# Altium PCB Receptor_AIS_R00.PcbDoc (part 1 of 2)
Units mm, origin at the board's own origin, x right, y up, seen from the top; angles counter-clockwise.
Board outline 80 x 80 mm, 4 copper layers (Top Layer, Layer 1, Layer 2, Bottom Layer), stack 1.587 mm thick; 130 components, 68 nets, 396 pads, 647 vias.
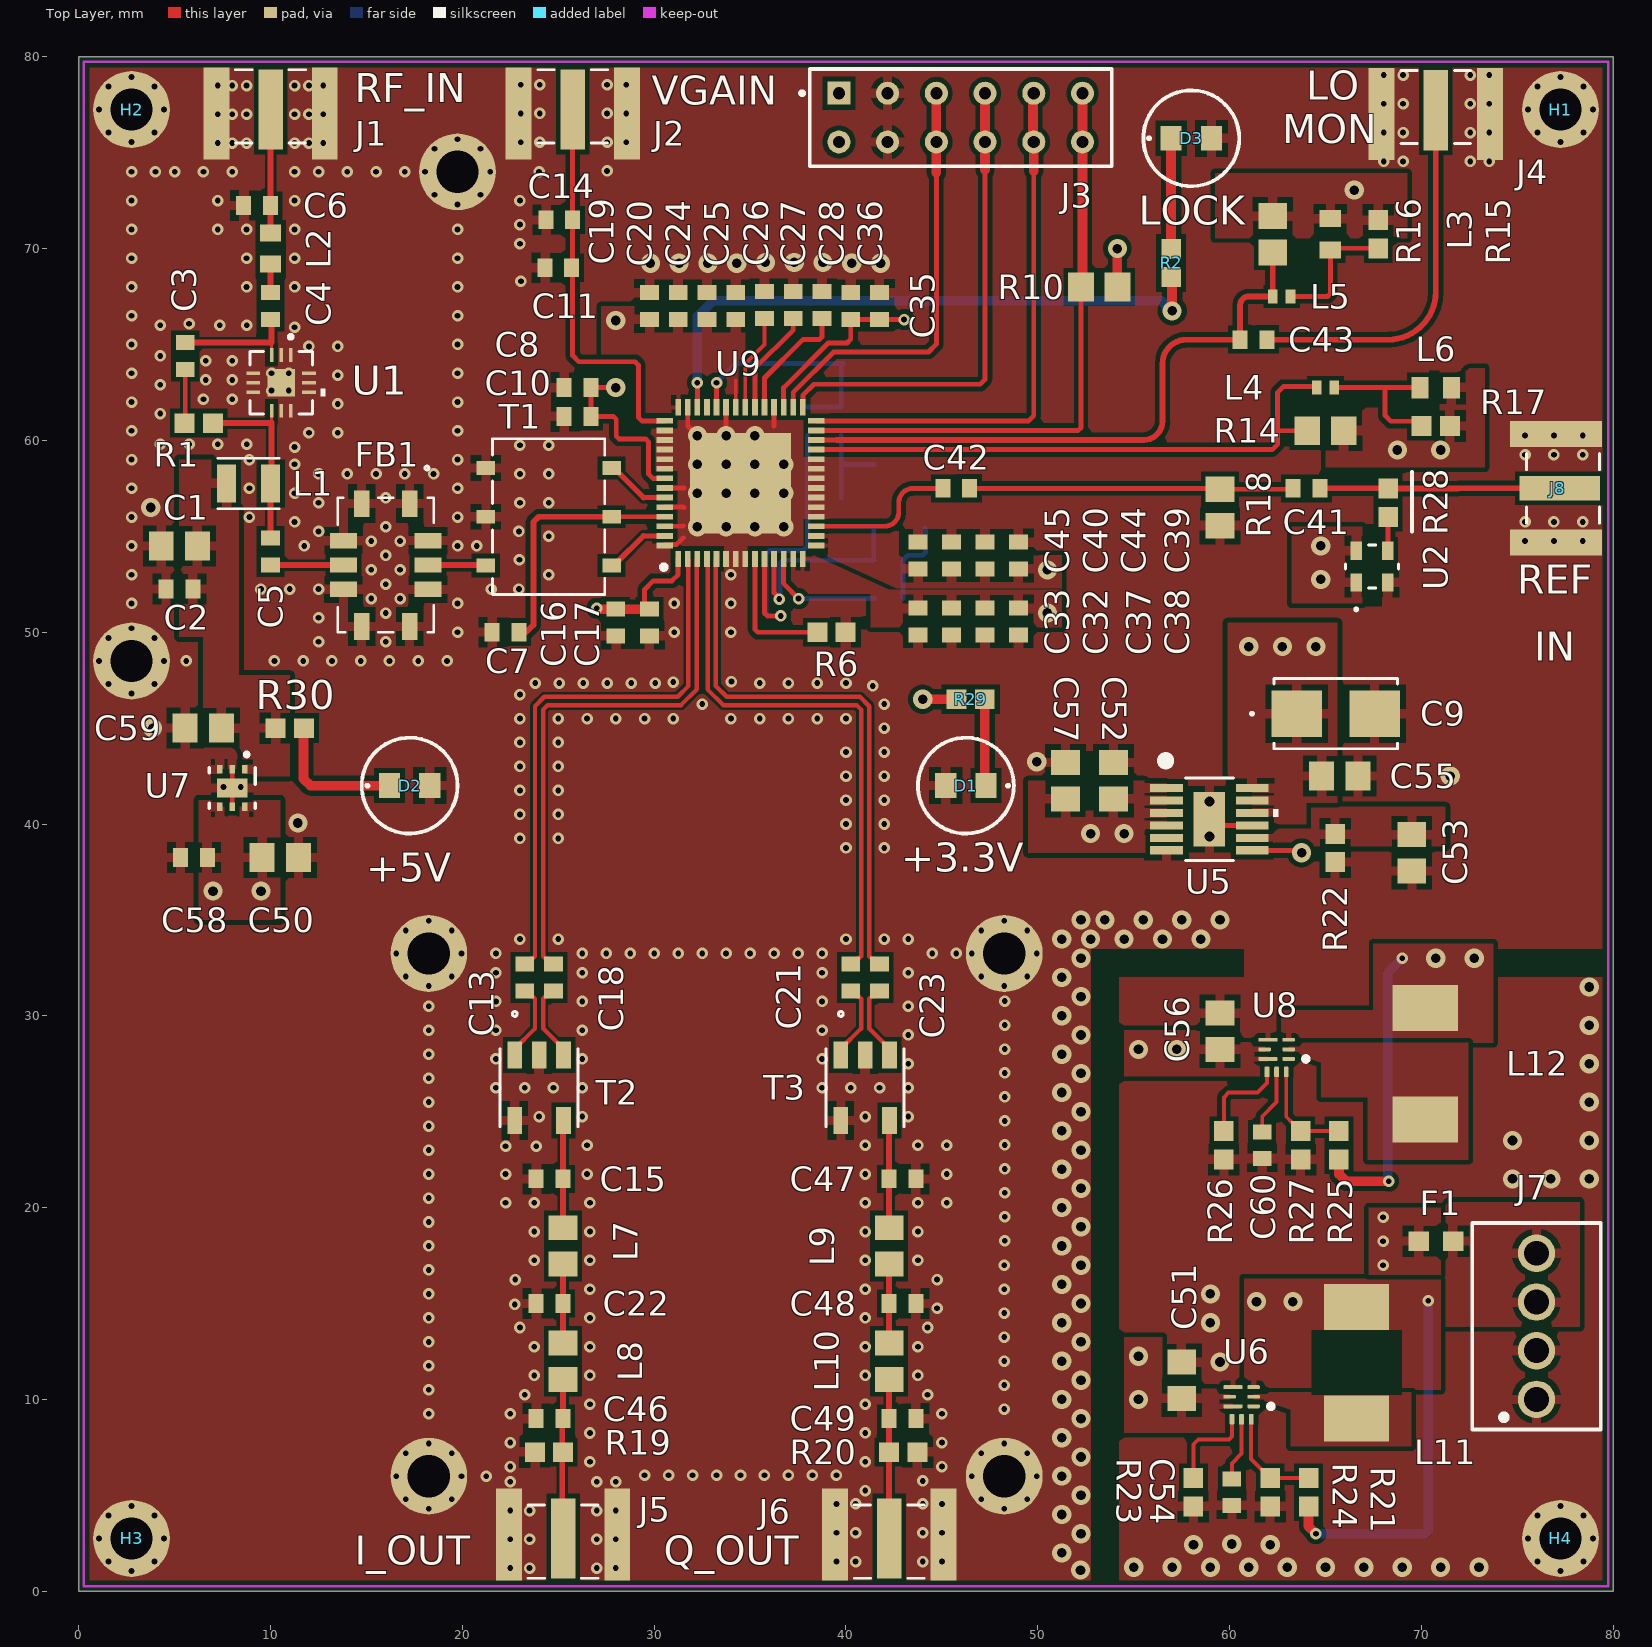
[diagram p0: Top Layer view]
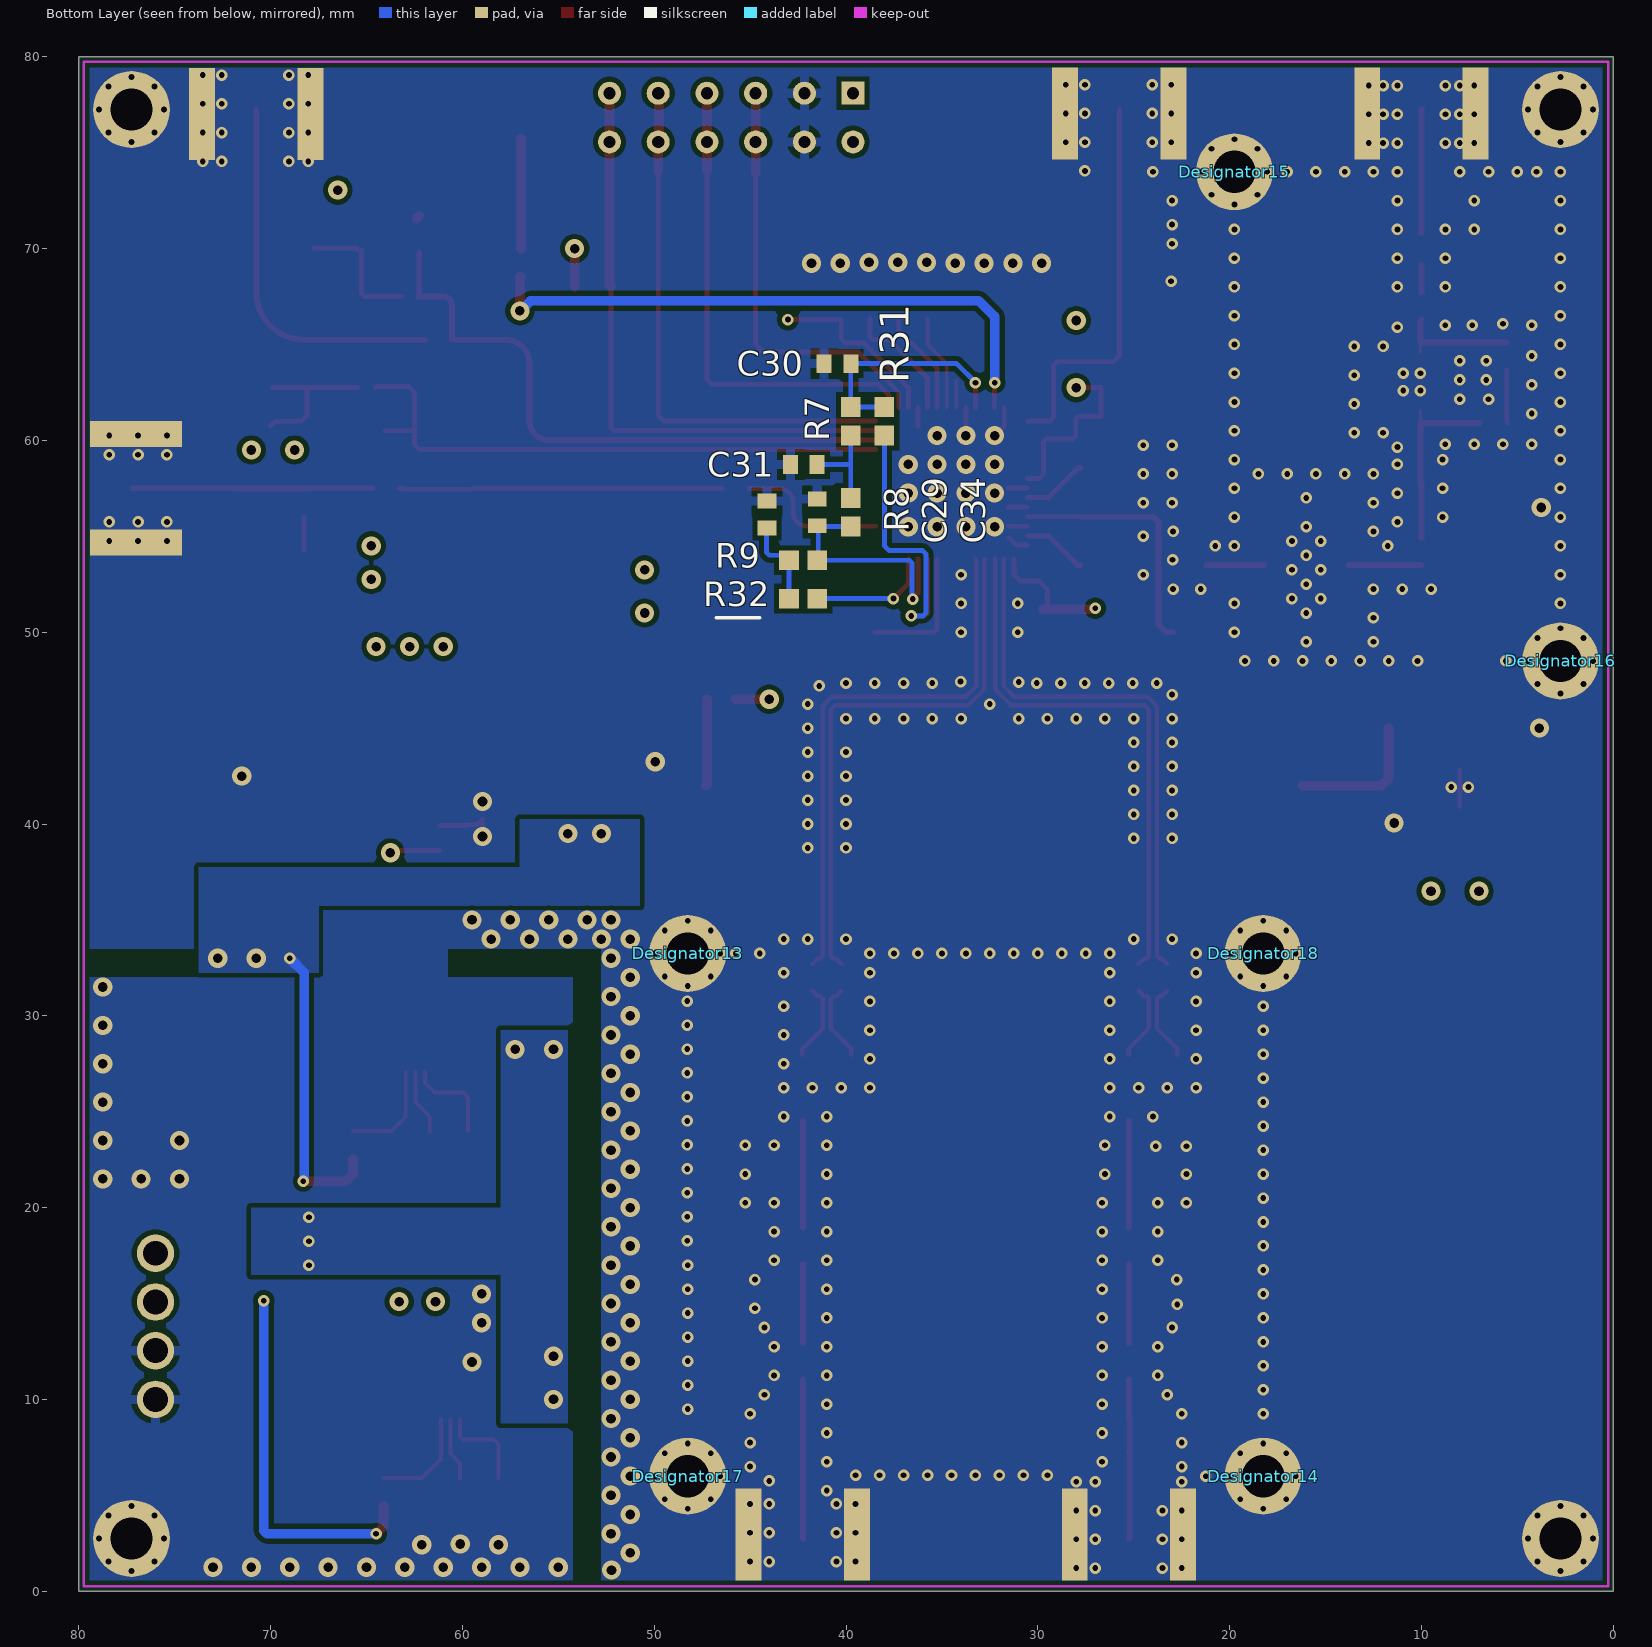
[diagram p1: Bottom Layer view, seen from below]
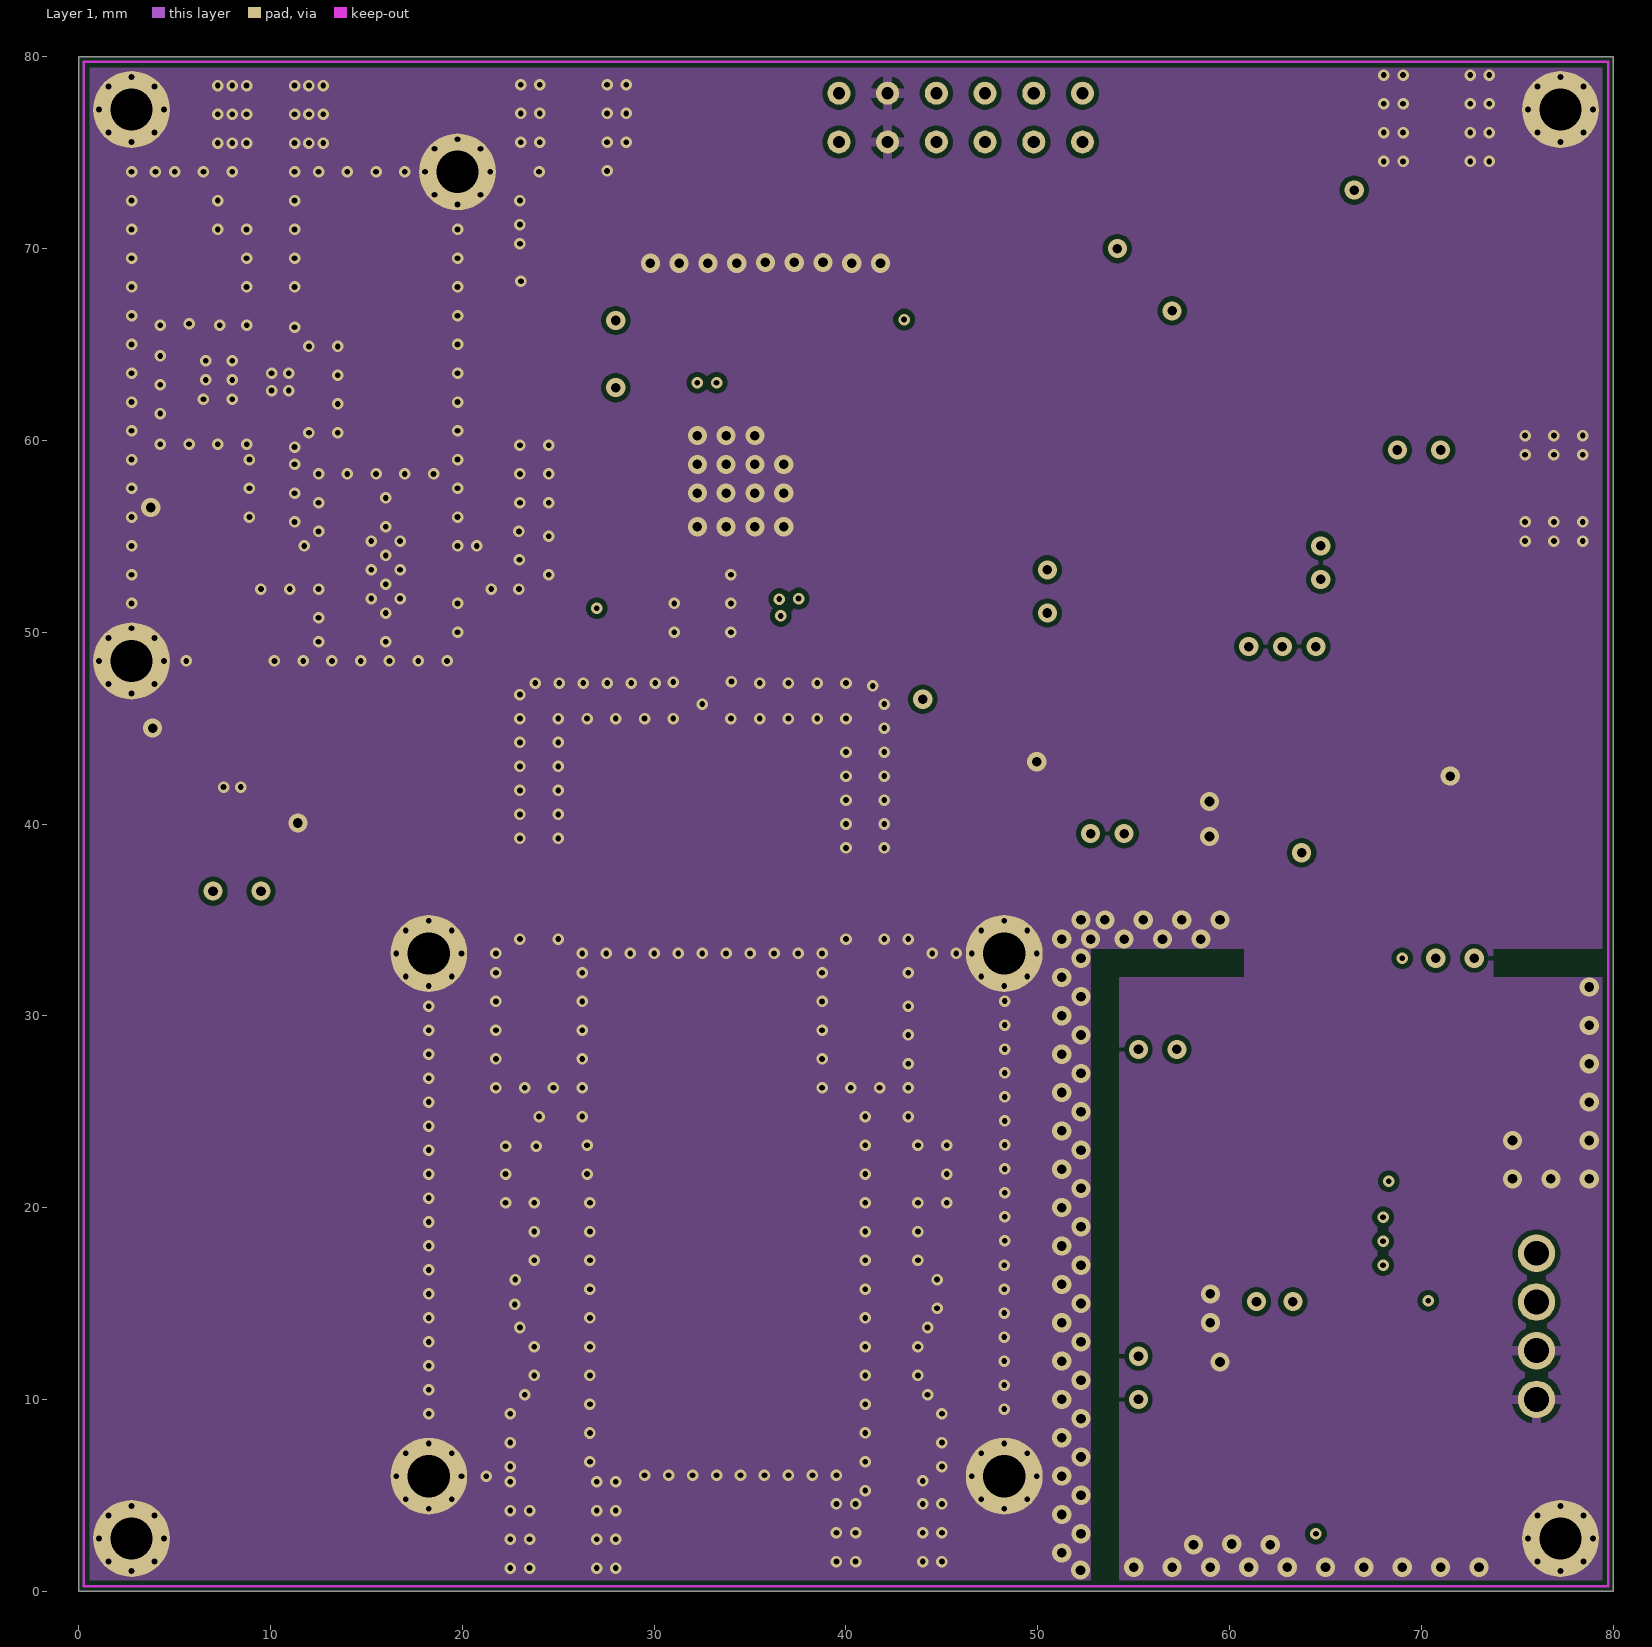
[diagram p2: Layer 1]
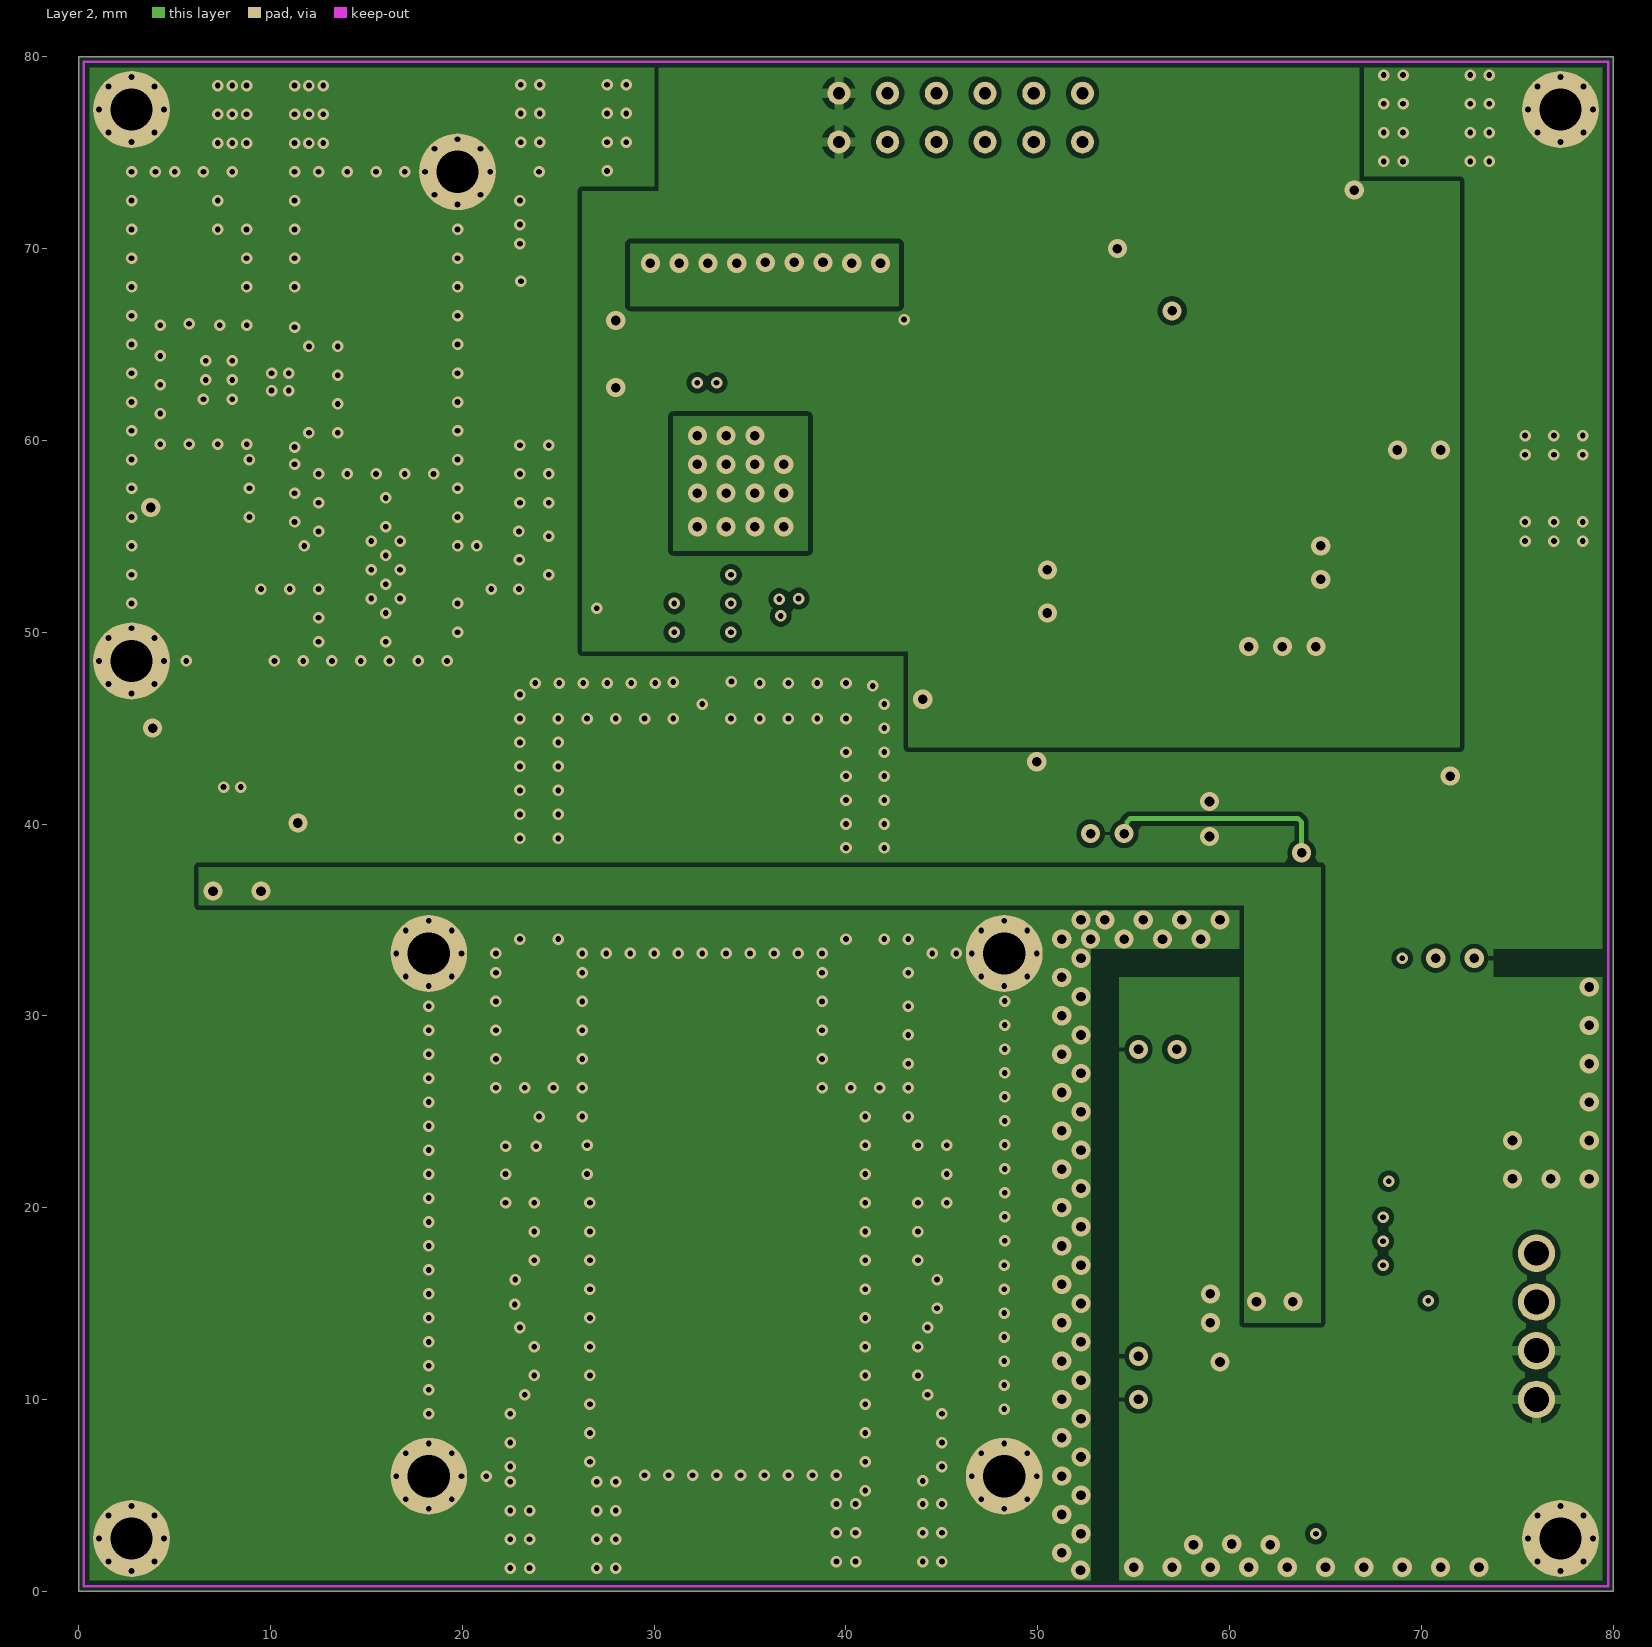
[diagram p3: Layer 2]
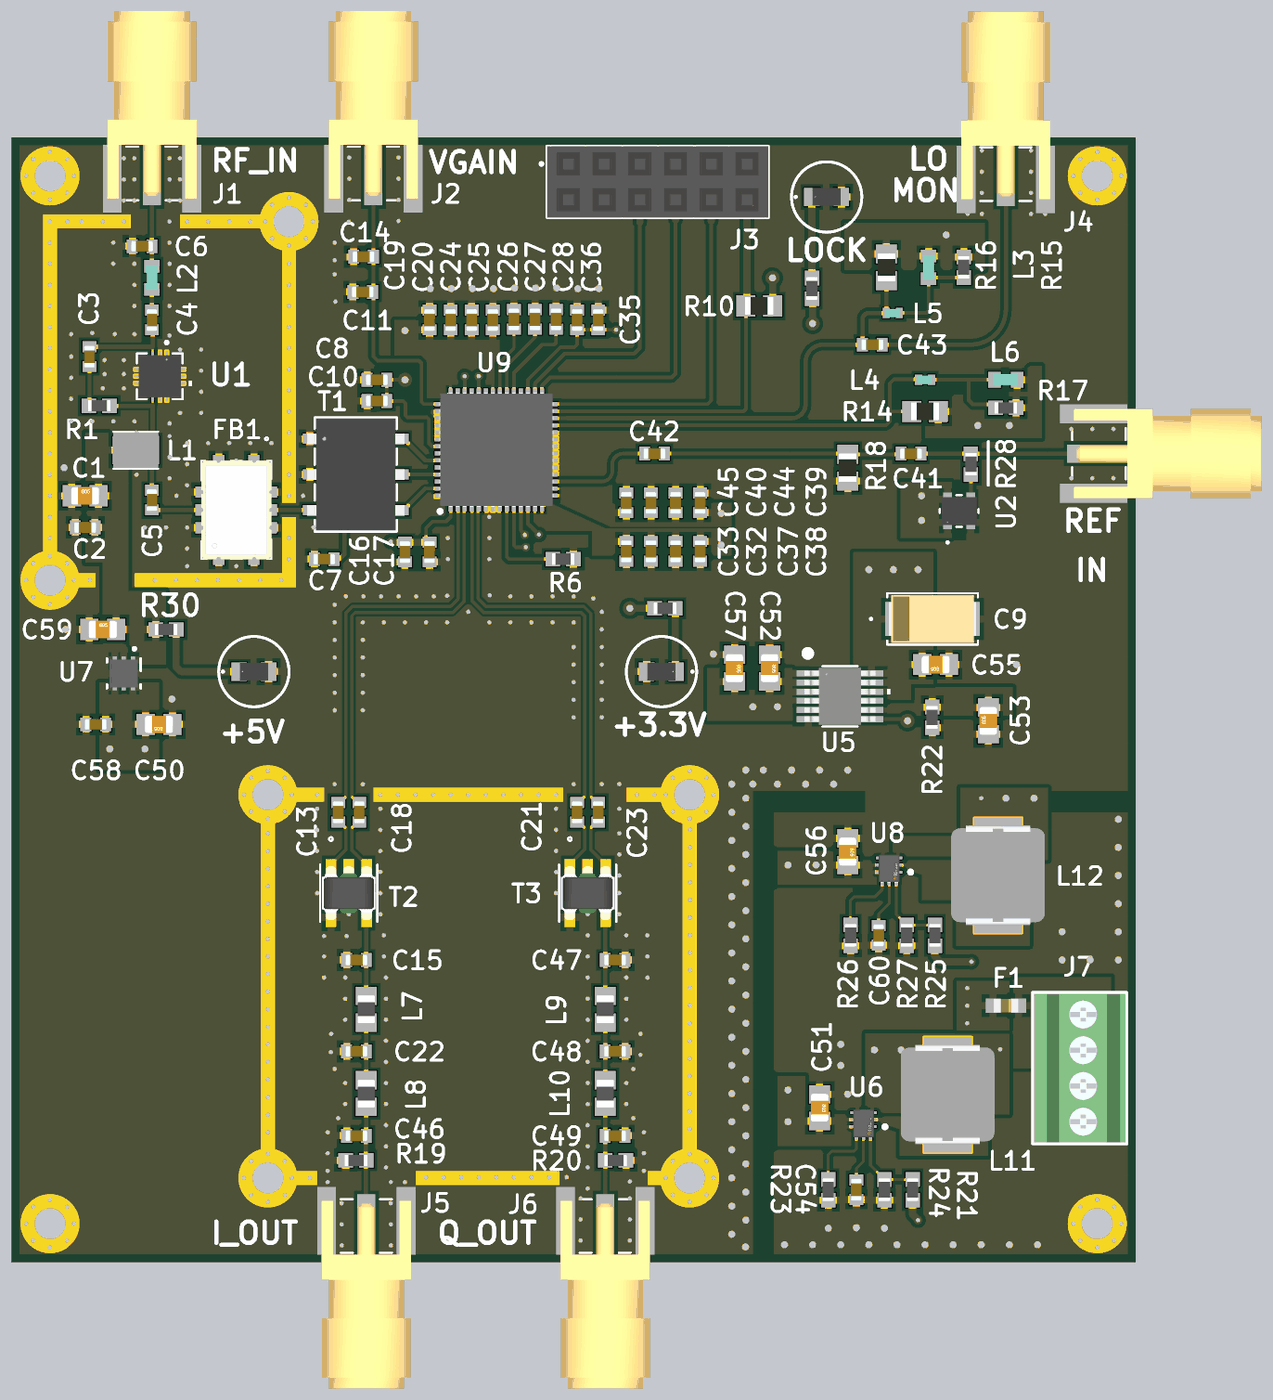
[diagram p5: 3D render of the assembled board from above, using the file's embedded part models]
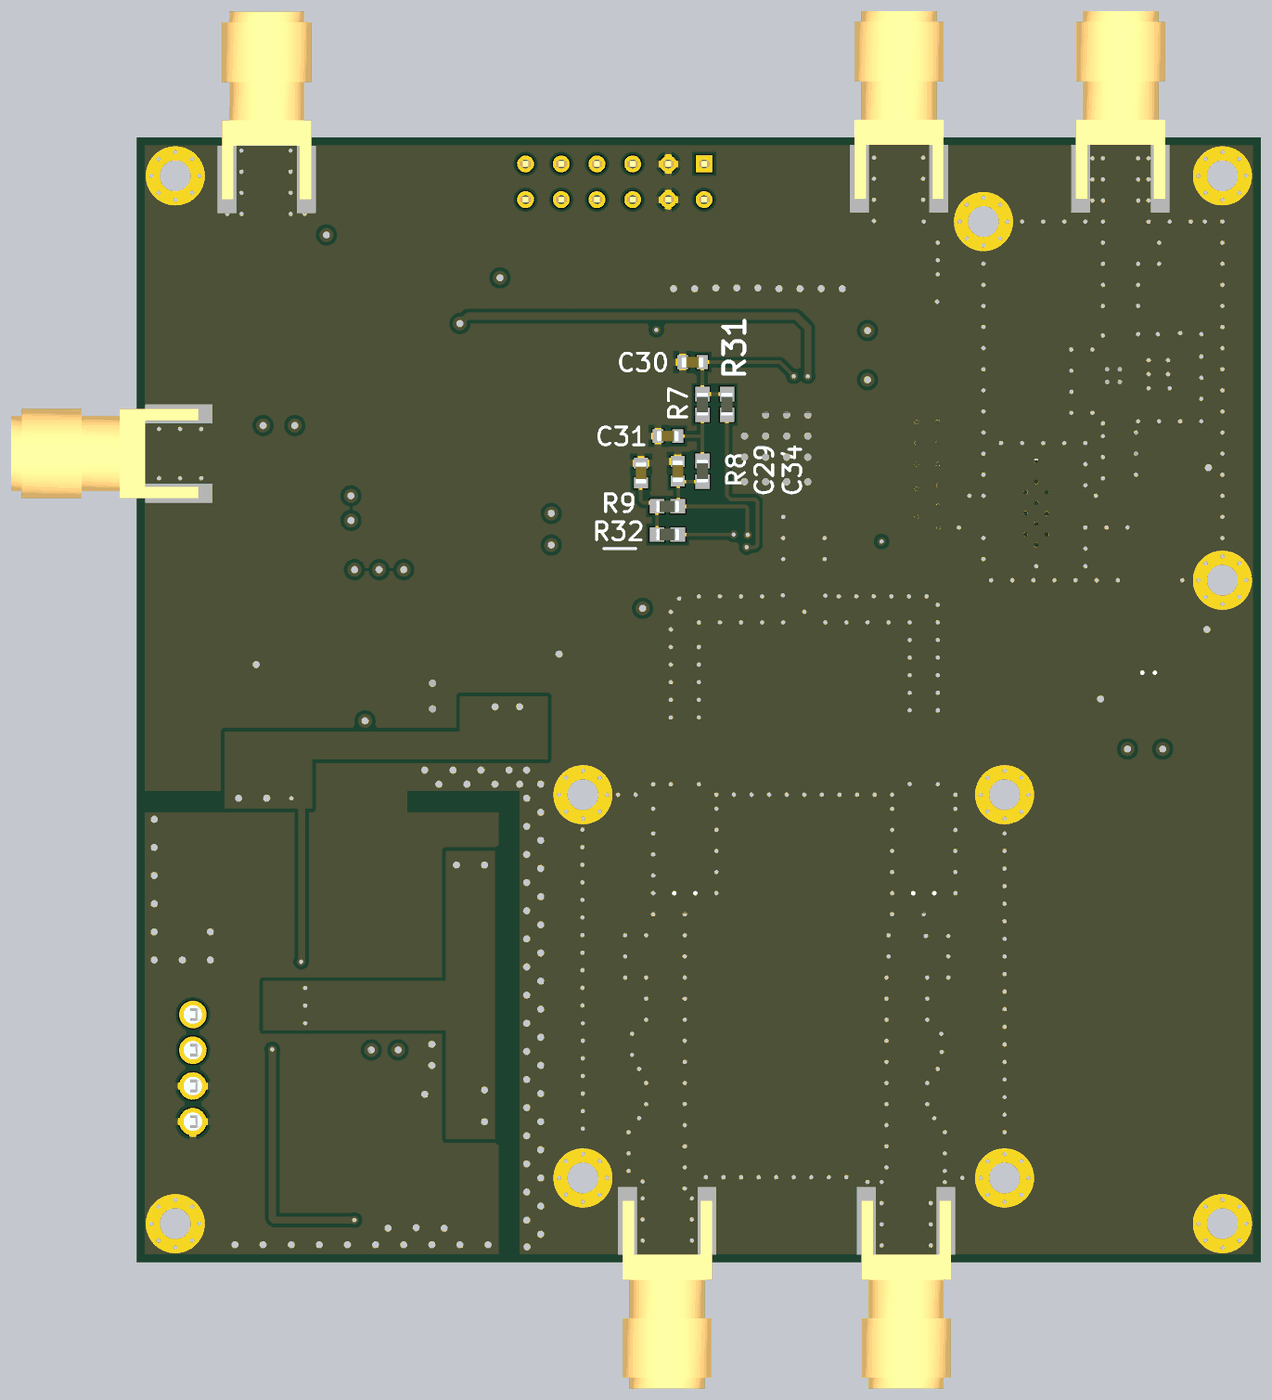
[diagram p6: 3D render of the assembled board from below, using the file's embedded part models]

## Layer stack, top to bottom
Top Solder: solder mask 0.0102, Solder Resist, Dk 3.5
Top Layer: signal copper 0.0356
Dielectric 2: prepreg 0.2104, PP-006, Dk 4.1
Layer 1: signal copper 0.0152
Dielectric 1: dielectric 1.065, FR-4, Dk 4.8
Layer 2: signal copper 0.0152
Dielectric 3: prepreg 0.2104, PP-006, Dk 4.1
Bottom Layer: signal copper 0.0356
Bottom Solder: solder mask 0.0102, Solder Resist, Dk 3.5

## Board outline
0,0 0,80 80,80 80,0

## Design rules (kind name [scope] priority, off if disabled: settings)
Clearance Clearance_50Ohm [InNetClass('RF_50Ohm')] p1: gap=0.152 ignorepadtopadclearanceinfootprint=FALSE except(0.254: SMDPad-Poly)
Clearance Clearance_1 [All] p2: gap=0.254 ignorepadtopadclearanceinfootprint=FALSE except(0.152: SMDPad-SMDPad; 0.203: Arc-Arc Arc-Track Arc-SMDPad Track-Track Track-SMDPad)
DiffPairsRouting [All] p1: maxlimit=0.2 minlimit=0.127 mostfreqgap=0.2 toplayer_mingap=0.2 toplayer_minwidth=0.231 toplayer_maxwidth=0.231 toplayer_prefwidth=0.231 midlayer1_maxgap=0.127 midlayer1_prefgap=0.127 midlayer1_minwidth=0.096 midlayer1_maxwidth=0.096 midlayer1_prefwidth=0.096 midlayer2_maxgap=0.127 midlayer2_prefgap=0.127 midlayer2_minwidth=0.096 midlayer2_maxwidth=0.096 midlayer2_prefwidth=0.096 bottomlayer_mingap=0.2 bottomlayer_minwidth=0.231 bottomlayer_maxwidth=0.231 bottomlayer_prefwidth=0.231 impedanceprofiledriven=TRUE impedanceprofileid={15203650-9548-4EA0-95AD-4FFA6F15E024} impedanceprofilevalue=100.000000 maxuncoupledlength=2
MinimumSolderMaskSliver [All] p1: minsoldermaskwidth=0.025
PolygonConnect ADRF_Connect_GND [HasFootprint('QFN50P800X800X100-57N-D') vs InNet('GND')] p1: thpad.connectstyle=Relief thpad.reliefconductorwidth=0.254 thpad.reliefentries=4 thpad.polygonreliefangle="90 Angle" thpad.airgapwidth=0.254 smdpad.connectstyle=Direct smdpad.reliefconductorwidth=0.3 smdpad.reliefentries=4 smdpad.polygonreliefangle="90 Angle" smdpad.airgapwidth=0.3 via.connectstyle=Direct via.reliefconductorwidth=0.254 via.reliefentries=4 via.polygonreliefangle="90 Angle" via.airgapwidth=0.254
PolygonConnect ADRF_Connect [HasFootprint('QFN50P800X800X100-57N-D')] p2: thpad.connectstyle=Relief thpad.reliefconductorwidth=0.254 thpad.reliefentries=4 thpad.polygonreliefangle="90 Angle" thpad.airgapwidth=0.254 smdpad.connectstyle=Relief smdpad.reliefconductorwidth=0.203 smdpad.reliefentries=4 smdpad.polygonreliefangle="90 Angle" smdpad.airgapwidth=0.203 via.connectstyle=Direct via.reliefconductorwidth=0.254 via.reliefentries=4 via.polygonreliefangle="90 Angle" via.airgapwidth=0.254
PolygonConnect Mounting_Hole_Connect [HasFootprint('MOUNTING_HOLE_M2')] p3: connectstyle=Direct reliefconductorwidth=0.254 reliefentries=4 polygonreliefangle="90 Angle" airgapwidth=0.254
PolygonConnect TSS-13LN+_GND_Connect [HasFootprint('TSS-13LN+') vs InNet('GND')] p4: connectstyle=Direct reliefconductorwidth=0.254 reliefentries=4 polygonreliefangle="90 Angle" airgapwidth=0.254
PolygonConnect SMA_Connect_GND [HasFootprint('CONN_SMA-J-P-H-ST-EM1_SAI') vs InNet('GND')] p5: thpad.connectstyle=Relief thpad.reliefconductorwidth=0.254 thpad.reliefentries=4 thpad.polygonreliefangle="90 Angle" thpad.airgapwidth=0.254 smdpad.connectstyle=Direct smdpad.reliefconductorwidth=0.3 smdpad.reliefentries=4 smdpad.polygonreliefangle="90 Angle" smdpad.airgapwidth=0.3 via.connectstyle=Direct via.reliefconductorwidth=0.254 via.reliefentries=4 via.polygonreliefangle="90 Angle" via.airgapwidth=0.254
PolygonConnect IND_Sw [HasFootprint('INDPM6965X240N')] p6: thpad.connectstyle=Relief thpad.reliefconductorwidth=0.254 thpad.reliefentries=4 thpad.polygonreliefangle="90 Angle" thpad.airgapwidth=0.254 smdpad.connectstyle=Direct smdpad.reliefconductorwidth=0.254 smdpad.reliefentries=4 smdpad.polygonreliefangle="90 Angle" smdpad.airgapwidth=0.254 via.connectstyle=Direct via.reliefconductorwidth=0.254 via.reliefentries=4 via.polygonreliefangle="90 Angle" via.airgapwidth=0.254
PolygonConnect SWIC_Connect_GND [HasFootprint('DD_05-08-1699_ADI') vs InNet('GND')] p7: connectstyle=Direct reliefconductorwidth=0.254 reliefentries=4 polygonreliefangle="90 Angle" airgapwidth=0.254
PolygonConnect SWIC_Connect [HasFootprint('FP-RPJ0009A-MFG')] p8: thpad.connectstyle=Relief thpad.reliefconductorwidth=0.254 thpad.reliefentries=4 thpad.polygonreliefangle="90 Angle" thpad.airgapwidth=0.254 smdpad.connectstyle=Relief smdpad.reliefconductorwidth=0.254 smdpad.reliefentries=4 smdpad.polygonreliefangle="90 Angle" smdpad.airgapwidth=0.254 via.connectstyle=Direct via.reliefconductorwidth=0.254 via.reliefentries=4 via.polygonreliefangle="90 Angle" via.airgapwidth=0.254
PolygonConnect PolygonConnect_Std_1 [All] p9: thpad.connectstyle=Relief thpad.reliefconductorwidth=0.5 thpad.reliefentries=4 thpad.polygonreliefangle="90 Angle" thpad.airgapwidth=0.3 smdpad.connectstyle=Relief smdpad.reliefconductorwidth=0.5 smdpad.reliefentries=4 smdpad.polygonreliefangle="90 Angle" smdpad.airgapwidth=0.3 via.connectstyle=Direct via.reliefconductorwidth=0.254 via.reliefentries=4 via.polygonreliefangle="90 Angle" via.airgapwidth=0.254
RoutingLayers [All] p1: top layer_v5=TRUE mid layer 1_v5=FALSE mid layer 2_v5=TRUE bottom layer_v5=TRUE
RoutingVias [All] p1: holewidth=0.711 width=1.27 viastyle="Through Hole" minholewidth=0.711 minwidth=1.27 maxholewidth=0.711 maxwidth=1.27 useviatemplates=TRUE viatemplateguid#1={E3C05DB7-2234-48B2-B235-F1C32EF2FF45} viatemplateguid#2={4835FC59-5613-4915-B51E-F01BEEFDC468} viatemplatename#1=V0.3h0.6d viatemplatename#2=V0.5h1d
SolderMaskExpansion [All] p1: expansion=0.1 istentingtop=FALSE
SupplyNets "Schematic Supply Nets_4" [InNet('+3.3V')] p1: voltage=0.000
SupplyNets "Schematic Supply Nets_3" [InNet('+5V')] p2: voltage=0.000
SupplyNets "Schematic Supply Nets_2" [InNet('12V')] p3: voltage=0.000
SupplyNets "Schematic Supply Nets_1" [InNet('GND')] p4: voltage=0.000
Width RF_50Ohm [InNetClass('RF_50Ohm')] p1: maxlimit=0.305 minlimit=0.152 preferedwidth=0.305 toplayer_minwidth=0.152 midlayer1_minwidth=0.187 midlayer1_maxwidth=0.277 midlayer1_prefwidth=0.187 midlayer2_minwidth=0.187 midlayer2_maxwidth=0.277 midlayer2_prefwidth=0.187 impedanceprofiledriven=TRUE impedanceprofileid={24A5968B-AF59-4961-8BEB-26930666F575} impedanceprofilevalue=50.000000 minimp=50.000000 maximp=50.000000 favimp=50.000000
Width [All] p2: maxlimit=2.54 minlimit=0.152 preferedwidth=0.254
27 further rules are at their usual default settings.

## Classes and differential pairs
component class RECEPTOR_AIS_BLK_R00: H1 H2 H3 H4
net class RF_50Ohm: I_+ I_- I_N I_P NetC3_1 NetC3_2 NetC4_1 NetC5_1 NetC5_2 NetC6_2 NetC15_2 NetC22_2 NetC46_2 NetC47_2 NetC48_2 NetC49_2 NetFB1_2 Q_+ Q_- Q_N Q_P RF+ RF-
component class AIS_PWR: C50 C51 C52 C53 C54 C55 C56 C57 C58 C59 C60 D1 D2 F1 J7 L11 L12 R21 R22 R23 R24 R25 R26 R27 R29 R30 U5 U6 U7 U8
component class AIS_HF: C1 C2 C3 C4 C5 C6 C7 FB1 J1 L1 L2 R1 T1 U1
component class AIS_FI: C15 C22 C46 C47 C48 C49 J5 J6 L7 L8 L9 L10 R19 R20 T2 T3 U3 U4
component class AIS_DEMOD: C8 C9 C10 C11 C13 C14 C16 C17 C18 C19 C20 C21 C23 C24 C25 C26 C27 C28 C29 C30 C31 C32 C33 C34 C35 C36 C37 C38 C39 C40 C41 C42 C43 C44 C45 D3 J2 J3 J4 J8 L3 L4 L5 L6 R2 R6 R7 R8 R9 R10 R14 R15 R16 R17 R18 R28 R31 R32 U2 U9
differential pair Q: +Q_+ -Q_-
differential pair I: +I_+ -I_-
differential pair Q: +Q_P -Q_N
differential pair I: +I_P -I_N

## Components (designator, comment, footprint, x,y, rotation, side; value= is the part's Value field where it differs from the comment)
C1 "10uF 25V X5R" C_0805 5.25,54.5 r0 top
C2 "1nF 50V C0G" C_0603 5.25,52.25 r180 top
C3 "0.1uF 16V X7R" C_0603 5.552,64.4 r270 top
C4 "2.2uF 16V X5R" C_0603 10,67 r270 top
C5 "2.2uF 16V X5R" C_0603 10,54.2 r270 top
C6 "1.5pF 50V C0G" C_0603 9.3,72.25 r0 top
C7 "10nF 25V C0G" C_0603 22.25,50 r0 top
C8 "56 pF 50V C0G" C_0603 26,62.75 r180 top
C9 "10 μF, 25 V, tantalum, TAJ-C" TAJC_AVX-M 65.532,45.75 r0 top
C10 "0.1uF 16V X7R" C_0603 26,61.25 r180 top
C11 "10 nF 25V X7R" C_0603 25,69 r180 top
C13 "100nF 6.3V X5R" C_0603 23.25,32 r270 top
C14 "0.1uF 16V X7R" C_0603 25.05,71.5 r180 top
C15 "130 pF 100V C0G" C_0603 24.55,21.5 r0 top
C16 "0.1uF 16V X7R" C_0603 28,50.5 r270 top
C17 "56 pF 50V C0G" C_0603 29.75,50.5 r270 top
C18 "100nF 6.3V X5R" C_0603 24.75,32 r270 top
C19 "0.1uF 16V X7R" C_0603 29.75,67 r90 top
C20 "56 pF 50V C0G" C_0603 31.25,67 r90 top
C21 "100nF 6.3V X5R" C_0603 40.25,32 r270 top
C22 "430 pF 100V C0G" C_0603 24.55,15 r0 top
C23 "100nF 6.3V X5R" C_0603 41.75,32 r270 top
C24 "0.1uF 16V X7R" C_0603 32.75,67 r90 top
C25 "56 pF 50V C0G" C_0603 34.25,67 r90 top
C26 "0.1uF 16V X7R" C_0603 35.75,67.05 r90 top
C27 "0.1uF 16V X7R" C_0603 37.25,67.05 r90 top
C28 "0.1uF 16V X7R" C_0603 38.75,67.05 r90 top
C29 "1.8nF 25V C0G" C_0603 41.5,56.25 r90 bottom
C30 "1nF 50V C0G" C_0603 40.45,64 r0 bottom
C31 "1nF 50V C0G" C_0603 42.2,58.75 r0 bottom
C32 "0.1uF 16V X7R" C_0603 45.5,50.55 r270 top
C33 "56 pF 50V C0G" C_0603 43.75,50.55 r270 top
C34 "1nF 50V C0G" C_0603 44.115,56.133 r90 bottom
C35 "0.1uF 16V X7R" C_0603 41.75,67 r90 top
C36 "56 pF 50V C0G" C_0603 40.25,67 r90 top
C37 "0.1uF 16V X7R" C_0603 47.25,50.55 r270 top
C38 "56 pF 50V C0G" C_0603 49,50.55 r270 top
C39 "0.1uF 16V X7R" C_0603 49,54 r90 top
C40 "56 pF 50V C0G" C_0603 45.5,54 r90 top
C41 "1nF 50V C0G" C_0603 64,57.5 r180 top
C42 "1nF 50V C0G" C_0603 45.75,57.5 r0 top
C43 "56 pF 50V C0G" C_0603 61.25,65.25 r0 top
C44 "0.1uF 16V X7R" C_0603 47.25,54 r90 top
C45 "56 pF 50V C0G" C_0603 43.75,54 r90 top
C46 "130 pF 100V C0G" C_0603 24.55,9 r0 top
C47 "130 pF 100V C0G" C_0603 42.95,21.5 r180 top
C48 "430 pF 100V C0G" C_0603 42.95,15 r180 top
C49 "130 pF 100V C0G" C_0603 42.95,9 r180 top
C50 "22 µF 16V X5R 0805" C_0805 10.5,38.25 r180 top
C51 "10uF 25V X5R" C_0805 57.5,11 r270 top
C52 "4.7 uF 50V X7S" C_0805 53.945,42.25 r270 top
C53 "4.7 uF 50V X7S" C_0805 69.5,38.5 r90 top
C54 "3300 pF 50V C0G" C_0603 60.115,5.163 r90 top
C55 "10uF 25V X5R" C_0805 65.75,42.5 r180 top
C56 "10uF 25V X5R" C_0805 59.5,29.2 r270 top
C57 "22 µF 16V X5R 0805" C_0805 51.445,42.25 r270 top
C58 "1uF 16V X7R" C_0603 6,38.25 r0 top
C59 "10uF 25V X5R" C_0805 6.5,45 r0 top
C60 "3300 pF 50V C0G" C_0603 61.7,23.25 r90 top
D1 "Led Green 0805" LED_0805 46.25,42 r180 top
D2 "Led Green 0805" LED_0805 17.25,42 r0 top
D3 "Led Green 0805" LED_0805 58,75.75 r0 top
Designator13 "Comment" Mounting_Hole_M2 48.25,33.25 r0 bottom
Designator14 "Comment" Mounting_Hole_M2 18.25,6 r0 bottom
Designator15 "Comment" Mounting_Hole_M2 19.75,74 r0 bottom
Designator16 "Comment" Mounting_Hole_M2 2.75,48.5 r0 bottom
Designator17 "Comment" Mounting_Hole_M2 48.25,6 r0 bottom
Designator18 "Comment" Mounting_Hole_M2 18.25,33.25 r0 bottom
F1 "2A 32VDC 0603" 0603_AVX-M 70.75,18.25 r180 top
FB1 "TA0395A - 156-162Mhz Filter" TA0395A 16,53.5 r90 top
H1 "Mounting_Hole" MOUNTING_HOLE_M2 77.25,77.25 r270 top
H2 "Mounting_Hole" MOUNTING_HOLE_M2 2.75,77.25 r270 top
H3 "Mounting_Hole" MOUNTING_HOLE_M2 2.75,2.75 r270 top
H4 "Mounting_Hole" MOUNTING_HOLE_M2 77.25,2.75 r270 top
J1 "SMA-J-P-X-ST-EM1" CONN_SMA-J-P-H-ST-EM1_SAI 10,77.545 r0 top
J2 "SMA-J-P-X-ST-EM1" CONN_SMA-J-P-H-ST-EM1_SAI 25.75,77.545 r0 top
J3 "SPI_2X6_CONN" Pin_Header_2x6 45.98,78.1 r0 top
J4 "SMA-J-P-X-ST-EM1" CONN_SMA-J-P-H-ST-EM1_SAI 70.75,77.5 r0 top
J5 "SMA-J-P-X-ST-EM1" CONN_SMA-J-P-H-ST-EM1_SAI 25.25,2.455 r180 top
J6 "SMA-J-P-X-ST-EM1" CONN_SMA-J-P-H-ST-EM1_SAI 42.25,2.455 r180 top
J7 "691210910004" 691210910004 76,13.81 r90 top
J8 "SMA-J-P-X-ST-EM1" CONN_SMA-J-P-H-ST-EM1_SAI 77.5,57.5 r270 top
L1 "15uH 300 mA" IND_LQH32DN150K53L 8.85,57.75 r180 top
L2 "5.1 nH - 700mA" L_0603 10,70 r270 top
L3 "10 µH 0805 300mA" L_0603 65.25,70.75 r90 top
L4 "20 nH 0402 370mA" L_0402 65,62.75 r0 top
L5 "20 nH 0402 370mA" L_0402 62.71,67.5 r0 top
L6 "10 µH 0805 300mA" L_0603 70.75,62.75 r0 top
L7 "820 nH 0805 180mA" L_0805 25.25,18 r270 top
L8 "820 nH 0805 180mA" L_0805 25.25,12 r270 top
L9 "820 nH 0805 180mA" L_0805 42.25,18 r270 top
L10 "820 nH 0805 180mA" L_0805 42.25,12 r270 top
L11 "2.2 µH 8A" INDPM6965X240N 66.615,11.913 r90 top
L12 "2.2 µH 8A" INDPM6965X240N 70.2,27.5 r90 top
R1 "1.5kΩ" R_0603 6.252,60.9 r180 top
R2 "1kΩ 1% 1/8W" R_0603 56.95,69.25 r270 top
R6 "4.7 kΩ, 1/10 W, 1%" R_0603 39.25,50 r0 top
R7 "200 Ω, 1/16 W, 5%" R_0603 39.75,61 r90 bottom
R8 "200 Ω, 1/16 W, 5%" R_0603 39.75,56.25 r90 bottom
R9 "220 Ω, 1/16 W, 5%" R_0603 42.235,53.75 r0 bottom
R10 "330 Ω, 1/16 W, 1%" R_0805 53.2,68 r0 top
R14 "51 Ω, 1/16 W, 1%" R_0805 65,60.5 r0 top
R15 "100 Ω, 1/10 W, 1%, 0603" R_0603 67.75,70.75 r90 top
R16 "51 Ω, 1/16 W, 1%" R_0805 62.25,70.75 r90 top
R17 "100 Ω, 1/10 W, 1%, 0603" R_0603 70.75,60.75 r0 top
R18 "51 Ω, 1/16 W, 1%" R_0805 59.5,56.5 r270 top
R19 "50Ω 1/10W 0603" R_0603 24.515,7.25 r0 top
R20 "50Ω 1/10W 0603" R_0603 42.985,7.25 r180 top
R21 "200K OHM 0.1% 1/10W 0603" R_0603 64.115,5.163 r270 top
R22 "33.2KΩ 0.1% 1/10W" R_0603 65.5,38.75 r90 top
R23 "16.9KΩ 1% 1/10W 0603" R_0603 58.115,5.163 r90 top
R24 "24.9KΩ 1% 1/10W 0603" R_0603 62.115,5.163 r90 top
R25 "140KΩ 0.1% 1/2W 0603" R_0603 65.7,23.25 r270 top
R26 "16.9KΩ 1% 1/10W 0603" R_0603 59.7,23.25 r90 top
R27 "24.9KΩ 1% 1/10W 0603" R_0603 63.7,23.25 r90 top
R28 "0 Ω, 1/8 W" R_0603 68.265,56.75 r90 top
R29 "100Ω 1% 1/8W" R_0603 46.5,46.5 r180 top
R30 "100Ω 1% 1/8W" R_0603 11,45 r180 top
R31 "0 Ω, 1/8 W" R_0603 38,61 r270 bottom
R32 "0 Ω, 1/8 W" R_0603 42.235,51.75 r180 bottom
T1 "ADT2-1T+" CD542_MNC 24.5,56.02 r0 top
T2 "MABAES0060" MABAES0060_MCM 24,26.25 r270 top
T3 "MABAES0060" MABAES0060_MCM 41,26.25 r270 top
U1 "TSS-13LN+" TSS-13LN+ 10.552,63 r270 top
U2 "DSC1001DL2-013.5000" CDFN4_2P5X2_MCH 67.425,53.423 r90 top
U5 "LT3045EMSE#TRPBF" 12-MSOP-EP 58.945,40.25 r0 top
U6 "TPS62902RPJR" FP-RPJ0009A-MFG 60.625,9.89 r180 top
U7 "TPS7A2650DRVR" DRV0006A_NV 8,41.875 r270 top
U8 "TPS62902RPJR" FP-RPJ0009A-MFG 62.45,28 r180 top
U9 "ADRF6850BCPZ" QFN50P800X800X100-57N-D 34.5,57.77 r90 top

## Footprints (in the part's own frame and the unit in brackets; to place one, negate y for a bottom-side part, rotate by r counter-clockwise, add the part's x,y. Pads: shape width x height; smd on the part's side, far side on the other; paste and mask are expansions set on the pad)
12-MSOP-EP [mil]
  rect 67x17 smd paste+0 mask+0: 1(-88,63.98) 2(-88,38.39) 3(-88,12.8) 4(-88,-12.8) 5(-88,-38.39) 6(-88,-63.98) 7(88,-63.98) 8(88,-38.39) 9(88,-12.8) 10(88,12.8) 11(88,38.39) 12(88,63.98)
  rect 65x112 smd paste-55.5 mask+0: EPAD(0,0)
  silkscreen extent -98,-84 142,128, body extent -99,-79 99,79, height 67
0603_AVX-M [mil]
  rect 42x40 smd paste+0 mask+0: 1(-35.5,0) 2(35.5,0)
  body extent -34,-19 34,19, height 35
691210910004 [mm]
  round 1.95 hole 1.3: 1(-3.81,0) 2(-1.27,0) 3(1.27,0) 4(3.81,0)
  silkscreen extent -5.38,-3.35 5.38,3.35, body extent -5.28,-3.25 5.28,3.25, height 8.55
C_0603 [mm]
  rect 0.78x0.98 smd: 1(-0.7,0) 2(0.7,0)
  body extent -0.8,-0.4 0.8,0.4, height 0.95
C_0805 [mm] "Chip Capacitor, 2-Leads, Body 2.00x1.25mm"
  rect 1.3x1.5 smd: 1(-0.95,0) 2(0.95,0)
  body extent -1,-0.62 1,0.63, height 0.78
CD542_MNC [mil]
  rect 38x28 smd: 1(-129,100) 2(-129,0) 3(-129,-100) 4(129,-100) 5(129,0) 6(129,100)
  silkscreen extent -254,-160 115,160, body extent -136,-155 136,155, height 112
CDFN4_2P5X2_MCH [mm]
  rect 0.955x0.599 smd paste+0 mask+0: 1(-0.827,0.825) 2(-0.827,-0.825) 3(0.827,-0.825) 4(0.827,0.825)
  silkscreen extent -2.31,-1.38 1.13,1.38, body extent -1,-1.25 1,1.25, height 0.85
CONN_SMA-J-P-H-ST-EM1_SAI [mil]
  rect 50x165 smd paste+0 mask+0: 1(0,-11.61)
  rect 53x189 smd paste+0 mask+0: 2(-111.22,-19.49) 3(111.22,-19.49)
  rect 53x189 smd far side paste+0 mask+0: 2(-111.22,-19.49) 3(111.22,-19.49)
  silkscreen extent -72,-80 72,70, body extent -125,-75 125,450, height 150
DRV0006A_NV [mm]
  rect 0.45x0.3 smd paste+0 mask+0: 1(-0.975,0.65) 2(-0.975,0) 3(-0.975,-0.65) 4(0.975,-0.65) 5(0.975,0) 6(0.975,0.65)
  rect 1x1.6 smd paste-0.5 mask+0: 7(0,0)
  silkscreen extent -1.85,-1.2 1.05,1.2, body extent -0.99,-1.01 1.01,0.99, height 0.8
FP-RPJ0009A-MFG [mm]
  rrect50% 0.65x0.2 smd paste+0 mask+0.076: 1(-0.625,0.25) 2(-0.625,-0.25) 3(-0.625,-0.75) 5(0.625,-0.25)
  rrect50% 1x0.2 smd paste+0 mask+0.076: 4(0.45,-0.75) 6(0.45,0.25)
  rrect40% 0.25x0.55 smd paste+0 mask+0.076: 7(0.5,0.925) 8(0,0.925) 9(-0.5,0.925)
  silkscreen extent -1.65,0.13 -1.4,0.37, body extent -0.75,-1 0.75,1, height 1
IND_LQH32DN150K53L [mm]
  rect 1x2 smd: 1(-1.15,0) 2(1.15,0)
  silkscreen extent -1.6,-1.32 1.6,1.32, body extent -1.6,-1.25 1.6,1.25, height 2.2
INDPM6965X240N [mm]
  rect 2.4x3.4 smd: 1(-2.9,0) 2(2.9,0)
  body extent -3.51,-3.33 3.56,3.34, height 2.9
L_0402 [mm]
  rect 0.51x0.73 smd: 1(-0.46,0) 2(0.46,0)
  body extent -0.5,-0.3 0.5,0.3, height 0.6
L_0603 [mm]
  rect 0.89x1.11 smd: 1(-0.814,0) 2(0.814,0)
  body extent -0.8,-0.4 0.8,0.4, height 1
L_0805 [mm] "Chip Inductor, 2-Leads, Body 2.00x1.25mm"
  rect 1.3x1.5 smd: 1(-0.95,0) 2(0.95,0)
  body extent -1,-0.63 1,0.63, height 1.45
LED_0805 [mm]
  rect 1.1x1.3 smd mask+0.1: 1(-1.05,0) 2(1.05,0)
  silkscreen extent -2.25,-0.05 -2.15,0.05, body extent -1,-0.62 1,0.62, height 0.81
MABAES0060_MCM [mil]
  rect 55x30 smd paste-15 mask+0: 1(-67.5,-50) 2(-67.5,0) 3(-67.5,50) 4(67.5,50) 5(67.5,-50)
  silkscreen extent -156,-80 80,80, body extent -75,-75 75,75, height 105
Mounting_Hole_M2 [mm]
  round 4 hole 2.2 paste-2539.97: 1(0,0)
MOUNTING_HOLE_M2 [mm]
  round 4 hole 2.2 paste-2539.97: 1(0,0)
Pin_Header_2x6 [mm]
  rect 1.2x1.2 / inner round 1.2 / far side rect 1.2x1.2 hole 0.635: 1(-6.35,0)
  round 1.2 hole 0.635: 2(-6.35,-2.54) 3(-3.81,0) 4(-3.81,-2.54) 5(-1.27,0) 6(-1.27,-2.54) 7(1.27,0) 8(1.27,-2.54) 9(3.81,0) 10(3.81,-2.54) 11(6.35,0) 12(6.35,-2.54)
  silkscreen extent -8.37,-3.81 7.87,1.27, body extent -7.87,-3.81 7.87,1.27, height 8.51
QFN50P800X800X100-57N-D [mm]
  rect 0.85x0.3 smd: 1(-3.95,3.25) 2(-3.95,2.75) 3(-3.95,2.25) 4(-3.95,1.75) 5(-3.95,1.25) 6(-3.95,0.75) 7(-3.95,0.25) 8(-3.95,-0.25) 9(-3.95,-0.75) 10(-3.95,-1.25) 11(-3.95,-1.75) 12(-3.95,-2.25) 13(-3.95,-2.75) 14(-3.95,-3.25) 29(3.95,-3.25) 30(3.95,-2.75) 31(3.95,-2.25) 32(3.95,-1.75) 33(3.95,-1.25) 34(3.95,-0.75) 35(3.95,-0.25) 36(3.95,0.25) 37(3.95,0.75) 38(3.95,1.25) 39(3.95,1.75) 40(3.95,2.25) 41(3.95,2.75) 42(3.95,3.25)
  rect 0.3x0.85 smd: 15(-3.25,-3.95) 16(-2.75,-3.95) 17(-2.25,-3.95) 18(-1.75,-3.95) 19(-1.25,-3.95) 20(-0.75,-3.95) 21(-0.25,-3.95) 22(0.25,-3.95) 23(0.75,-3.95) 24(1.25,-3.95) 25(1.75,-3.95) 26(2.25,-3.95) 27(2.75,-3.95) 28(3.25,-3.95) 43(3.25,3.95) 44(2.75,3.95) 45(2.25,3.95) 46(1.75,3.95) 47(1.25,3.95) 48(0.75,3.95) 49(0.25,3.95) 50(-0.25,3.95) 51(-0.75,3.95) 52(-1.25,3.95) 53(-1.75,3.95) 54(-2.25,3.95) 55(-2.75,3.95) 56(-3.25,3.95)
  rect 5.25x5.25 smd: 57(0,0)
  silkscreen extent -4.5,3.87 -4.25,4.12, body extent -4.05,-4.05 4.05,4.05, height 1
R_0603 [mm]
  rect 1.04x1.02 smd: 1(-0.735,0) 2(0.735,0)
  body extent -0.8,-0.4 0.8,0.4, height 0.55
R_0805 [mm] "Chip Resistor, 2-Leads, Body 2.00x1.25mm, IPC Low Density"
  rect 1.35x1.5 smd: 1(-0.95,0) 2(0.95,0)
  body extent -1,-0.62 1,0.62, height 0.6
TA0395A [mm] "PassBand Filter 156-162Mhz"
  rect 0.8x1.4 smd mask+0.1: 1(-1.27,-2.2) 2(0,-2.2) 3(1.27,-2.2) 6(1.27,2.2) 7(0,2.2) 8(-1.27,2.2)
  rect 1.4x0.8 smd mask+0.1: 4(3.2,-1.25) 5(3.2,1.25) 9(-3.2,1.25) 10(-3.2,-1.25)
  silkscreen extent -3.5,-2.5 3.5,2.5, body extent -3.5,-2.51 3.5,2.49, height 2
TAJC_AVX-M [mil]
  rect 104x95 smd paste+0 mask+0: 1(-80,0) 2(80,0)
  silkscreen extent -175,-72 127,72, body extent -122,-67 122,67, height 112
TSS-13LN+ [mil]
  rect 28x7 smd paste+0: 1(-57,19.68) 2(-57,0) 3(-57,-19.69) 7(57,-19.69) 8(57,0) 9(57,19.68)
  rect 7x28 smd paste+0: 4(-19.68,-57) 5(0,-57) 6(19.68,-57) 10(19.68,57) 11(0,57) 12(-19.68,57)
  rect 57x57 smd paste+0: 13(0,0)
  silkscreen extent -98,-64 64,91, body extent -59,-59 59,59, height 35

## Part data
C1 C51 C55 C56 C59: library part "Capacitor NP", "10 µF ±10% 25V Ceramic Capacitor X5R 0805 (2012 Metric)"
C2 C30 C31 C34 C41 C42: library part "Capacitor NP", "1000 pF ±5% 50V Ceramic Capacitor C0G, NP0 0603 (1608 Metric)"
C3 C10 C14 C16 C19 C24 C26 C27 C28 C32 C35 C37 C39 C44: library part "Capacitor NP", "0.1 µF ±10% 16V Ceramic Capacitor X7R 0603 (1608 Metric)"
C4 C5: library part "Capacitor NP", "2.2 µF ±10% 16V Ceramic Capacitor X5R 0603 (1608 Metric)"
C6: library part "Capacitor NP", "1.5 pF ±0.25pF 50V Ceramic Capacitor C0G, NP0 0603 (1608 Metric)"
C7: library part "Capacitor NP", "10000 pF ±5% 25V Ceramic Capacitor C0G, NP0 0603 (1608 Metric)"
C8 C17 C20 C25 C33 C36 C38 C40 C43 C45: library part "Capacitor NP", "56 pF ±5% 50V Ceramic Capacitor C0G, NP0 0603 (1608 Metric)"
C9: library part "Capacitor Pol", "10 µF Molded Tantalum Capacitors 25 V 2312 (6032 Metric) 1.8Ohm"
C11: library part "Capacitor NP", "10000 pF ±10% 25V Ceramic Capacitor X7R 0603 (1608 Metric)"
C13 C18 C21 C23: library part "Capacitor NP", "0.1 µF ±10% 6.3V Ceramic Capacitor X5R 0603 (1608 Metric)"
C15 C46 C47 C49: library part "Capacitor NP", "130 pF ±1% 100V Ceramic Capacitor C0G, NP0 0603 (1608 Metric)"
C22 C48: library part "Capacitor NP", "430 pF ±5% 100V Ceramic Capacitor C0G, NP0 0603 (1608 Metric)"
C29: library part "Capacitor NP", "1800 pF ±5% 25V Ceramic Capacitor C0G, NP0 0603 (1608 Metric)"
C50 C57: library part "Capacitor NP", "22 µF ±20% 16V Ceramic Capacitor X5R 0805 (2012 Metric)"
C52 C53: library part "Capacitor NP", "4.7 µF ±10% 50V Ceramic Capacitor X7S 0805 (2012 Metric)"
C54 C60: library part "Capacitor NP", "3300 pF ±1% 50V Ceramic Capacitor C0G, NP0 0603 (1608 Metric)"
C58: library part "Capacitor NP", "1 µF ±5% 16V Ceramic Capacitor X7R 0603 (1608 Metric)"
D1 D2 D3: library part Led, "Green 569nm LED Indication - Discrete 2.1V 0805 (2012 Metric)"
F1: library part FUSIBLE, "2 A 32 V Fuse Board Mount (Cartridge Style Excluded) Surface Mount 0603 (1608 Metric)"
FB1: library part TA0395A, "159.1625MHz Frequency Wireless RF SAW Filter (Surface Acoustic Wave) 3.8dB 5.725MHz Bandwidth 10-SMD, No Lead"
J1 J2 J4 J5 J6 J8: "SMA Connector Jack, Female Socket 50 Ohms Board Edge, Cutout; Surface Mount Solder", Package=None, Check_prices=https://www.snapeda.com/parts/SMA-J-P-H-ST-EM3/Samtec+Inc./view-part/?ref=eda, MF=Samtec, MP=SMA-J-P-H-ST-EM3, SnapEDA_Link=https://www.snapeda.com/parts/SMA-J-P-H-ST-EM3/Samtec+Inc./view-part/?ref=snap
J3: library part SPI_2x6Pin_Connection
J7: library part Conn_1x4_WE, "WR-TBL Terminal block - Screwless Push IN - THT", Manufacturer_Name="Wurth Electronics", Manufacturer_Part_Number=691412320004, Copyright="Copyright (C) 2025 Ultra Librarian. All rights reserved.", RefDes=RefDes, Type=Type
L1: library part IND, "LQH32DN150K53L - 15 µH Unshielded Drum Core, Wirewound Inductor 300 mA 754mOhm Max Nonstandard"
L2: library part IND, "LQW18AS5N1J00D - 5.1 nH Unshielded Wirewound Inductor 700 mA 140mOhm Max 0603 (1608 Metric)"
L3 L6: library part IND, "LQM18DN100M70L - 10 µH Shielded Multilayer Inductor 300 mA 1.365Ohm Max 0603 (1608 Metric)"
L4 L5: library part IND, "LQW15AN20NJ00D - 20 nH Unshielded Wirewound Inductor 370 mA 270mOhm Max 0402 (1005 Metric)"
L7 L8 L9 L10: library part IND, "FIXED IND 820NH 180MA 2.35 OHM"
L11 L12: library part IND, "IHLP2525CZER2R2M01 - 2.2 µH Shielded Molded Inductor 8 A 20mOhm Max Nonstandard"
R1: library part Res1, "1.5 kΩ ±1% 0.1W, 1/10W Chip Resistor 0603 (1608 Metric) Moisture Resistant Thick Film"
R2 R29 R30: library part Res1, "100 Ohms ±0.1% 1/8W Chip Resistor 0603 (1608 Metric) Thin Film"
R6: library part Res1, "4.7 kOhms ±1% 0.1W, 1/10W Chip Resistor 0603 (1608 Metric) Moisture Resistant Thick Film"
R7 R8: library part Res1, "200 Ohms ±5% 0.1W, 1/10W Chip Resistor 0603 (1608 Metric) Moisture Resistant Thick Film"
R9: library part Res1, "220 Ohms ±5% 0.1W, 1/10W Chip Resistor 0603 (1608 Metric) Moisture Resistant Thick Film"
R10: library part Res1, "330 Ohms ±1% 0.125W, 1/8W Chip Resistor 0805 (2012 Metric) Moisture Resistant Thick Film"
R14 R16 R18: library part Res1, "CR0805-FX-51R0ELF - 51 Ohms ±1% 0.125W, 1/8W Chip Resistor 0805 (2012 Metric) Moisture Resistant Thick Film"
R15 R17: library part Res1, "100 Ohms ±1% 0.1W, 1/10W Chip Resistor 0603 (1608 Metric) Moisture Resistant Thick Film"
R19 R20: library part Res1, "50 Ohms ±0.1% 0.1W, 1/10W Chip Resistor 0603 (1608 Metric) Thin Film"
R21: library part Res1, "200 kOhms ±0.1% 0.1W, 1/10W Chip Resistor 0603 (1608 Metric) Thin Film"
R22: library part Res1, "33.2 kOhms ±0.1% 0.1W, 1/10W Chip Resistor 0603 (1608 Metric) Thin Film"
R23 R26: library part Res1, "16.9 kOhms ±0.1% 0.1W, 1/10W Chip Resistor 0603 (1608 Metric) Thin Film"
R24 R27: library part Res1, "24.9 kOhms ±0.1% 0.1W, 1/10W Chip Resistor 0603 (1608 Metric) Thin Film"
R25: library part Res1, "140 kOhms ±1% 0.5W, 1/2W Chip Resistor 0603 (1608 Metric) Automotive AEC-Q200, Pulse Withstanding Thick Film"
R28 R31 R32: library part Res1, "CR0805-FX-51R0ELF - 0 Ohms Jumper 0.125W, 1/8W Chip Resistor 0603 (1608 Metric) Automotive AEC-Q200 Thick Film"
T1 U1: "Description", Manufacturer_Name="Mini Circuits", RefDes=RefDes
  T1: Copyright="Copyright (C) 2026 Ultra Librarian. All rights reserved.", Manufacturer_Part_Number=ADT2-1T+, Type=Balun
  U1: Copyright="Copyright (C) 2025 Ultra Librarian. All rights reserved.", Manufacturer_Part_Number=TSS-13LN+, Type=Type
T2 T3: "RF Balun 300kHz ~ 200MHz 1:1 6-SMD (5 Leads), Flat Lead", Package="SMD-6 Mini-Circuits", Check_prices=https://www.snapeda.com/parts/ADT1-6T+/Mini-Circuits/view-part/?ref=eda, MF=Mini-Circuits, MP=ADT1-6T+, SnapEDA_Link=https://www.snapeda.com/parts/ADT1-6T+/Mini-Circuits/view-part/?ref=snap
U2: "13.5 MHz XO (Standard) CMOS Oscillator 1.7V ~ 3.6V Standby (Power Down) 4-VDFN", Manufacturer_Name=Microchip, Copyright="Copyright (C) 2026 Ultra Librarian. All rights reserved.", Manufacturer_Part_Number=DSC1001DL2-013.5000, RefDes=RefDes, Type=Type
U5: library part LT3045EMSETRPBF, "20V, 500mA, Ultralow Noise, Ultrahigh PSRR Linear Regulator", Manufacturer_Name="Analog Devices Inc", Copyright="Copyright (C) 2026 Ultra Librarian. All rights reserved.", Manufacturer_Part_Number=LT3045EMSE#TRPBF, RefDes=RefDes, Type=Type
U6 U8: "TPS62902RPJR 3-V TO 17-V, 2-A, HIGH-EFFICIENC", Manufacturer Part Number=TPS62902RPJR
U7: "500-mA, 18-V, ultra-low-IQ, high-accuracy, adjustable low-dropout voltage regulator with power good 6-WSON -40 to 125", Manufacturer_Name="Texas Instruments", Copyright="Copyright (C) 2025 Ultra Librarian. All rights reserved.", Manufacturer_Part_Number=TPS7A2650DRVR, RefDes=RefDes, Type=TYPE
U9: "ADRF6850BCPZ, Demodulator Quadrature 250MHz 3.15  3.45 V 56-Pin LFCSP VQ", Manufacturer_Name="Analog Devices", Mouser Part Number=584-ADRF6850BCPZ, Datasheet Link=https://componentsearchengine.com/Datasheets/2/ADRF6850BCPZ.pdf, Geometry.Height=1mm, Manufacturer_Part_Number=ADRF6850BCPZ, Mouser Price/Stock=https://www.mouser.co.uk/ProductDetail/Analog-Devices/ADRF6850BCPZ?qs=WIvQP4zGanhitN%252B3d2%252BYqw%3D%3D

## Via types
v1: diameter 0.6, hole 0.3, Top Layer to Bottom Layer, tented both sides, 472 vias
v2: diameter 1, hole 0.5, Top Layer to Bottom Layer, tented both sides, 127 vias
v3: diameter 0.6, hole 0.3, Top Layer to Bottom Layer, 48 vias

## Nets (pads, with @x,y where several pads share a name; then routed paths per layer and width w, separated by ;. In a path a pad name is that pad's centre, name@x,y a point inside that pad or via, vN(x,y) a via of type N, cw(c..) or ccw(c..) an arc to the next point about the centre after c; other vN are vias at no path point)
12V: F1.1 J7.3 J7.4
+3.3V: C8.1 C9.1 C10.1 C16.1 C17.1 C19.1 C20.1 C24.1 C25.1 C32.1 C33.1 C35.1 C36.1 C37.1 C38.1 C39.1 C40.1 C44.1 C45.1 C55.2 J3.1 J3.2 L3.2 L6.2 R10.2 R14.2 R15.2 R16.2 R17.2 R29.2 U2.1 U2.4 U5.10 U5.11 U5.12 U9.1 U9.13 U9.14 U9.15 U9.16 U9.31 U9.36 U9.42 U9.49 | length 31
  Top Layer w0.203: U9.36@34.25,61.72 34.25,63.125
  Top Layer w0.254: C8.1@26.7,62.75 C10.1@26.7,61.25 27.876,61.25 28.025,61.101 28.025,60.224 28.174,60.075 29.551,60.075 29.7,59.926 29.7,58.25 29.93,58.02 U9.49@30.55,58.02 ; C8.1@26.75,62.75 v2(28,62.75) ; C17.1@29.75,51.2 29.5,51.45 29.5,52.225 29.95,52.675 30.925,52.675 31.25,53 U9.1@31.25,53.82 ; U9.31@36.75,61.72 36.75,62.75 39.075,65.075 40.05,65.075 40.25,65.275 C36.1@40.25,66.3 C35.1@41.75,66.3 v1(43.025,66.3)
  Top Layer w0.5: v1(27,51.25) 27.027,51.25 27.077,51.2 C16.1@28,51.2 C17.1@29.75,51.2 ; v2(44,46.5) R29.2@45.765,46.5 ; R10.2@54.15,68 54.15,69.765 54.25,69.865 v2@54.25,70 ; R16.2@62.25,71.7 R16.2@62.386,71.564
  other v2: 61,49.25 62.75,49.25 64.5,49.25 50.5,51 64.75,52.75 50.5,53.25 64.75,54.5 68.75,59.5 71,59.5 28,66.25 54.15,70 66.5,73.05
+5V: C1.2 C2.1 C59.2 L1.2 R30.2 U7.1
CLK/SCL: J3.5 J3.6 U9.30 | length 24
  Top Layer w0.254: U9.30@37.25,61.72 37.25,62.5 39.356,64.606 44.301,64.606 44.71,65.015 J3.6@44.71,75.56
  Top Layer w0.508: 44.71,73.96 J3.6@44.71,75.56 J3.5@44.71,78.1